# EAGLE board lcd_booster-old (EAGLE 6.1)
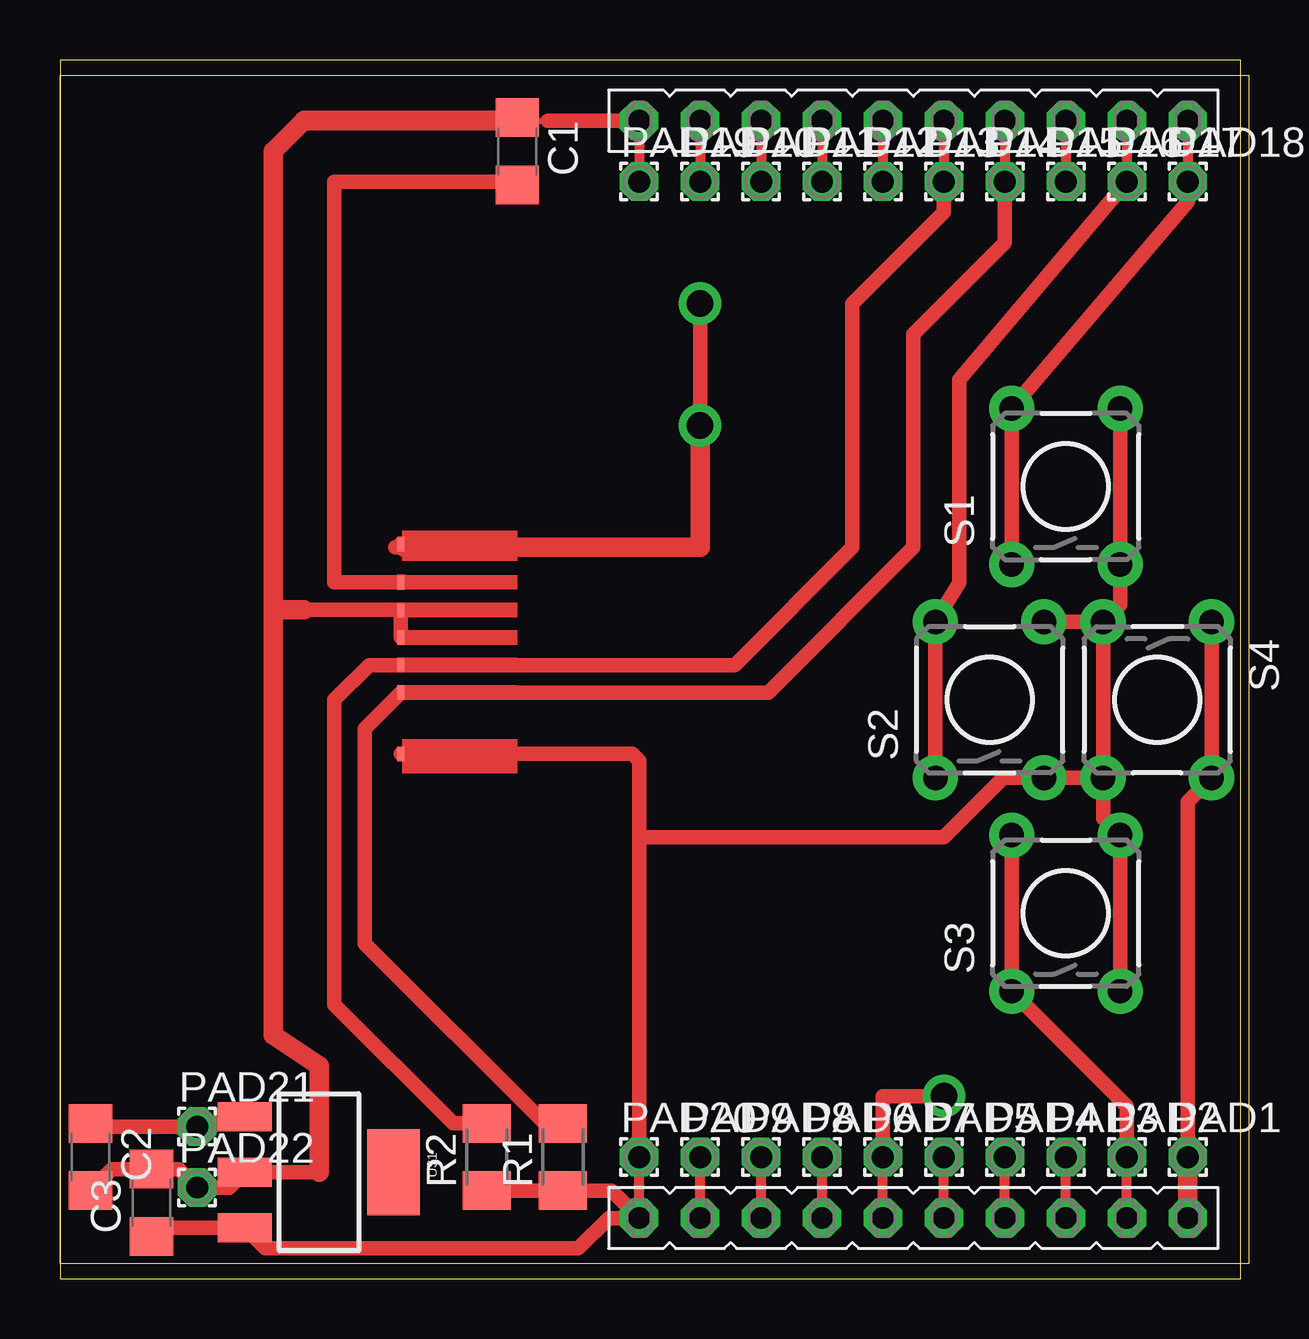
[diagram p0: board, top side]
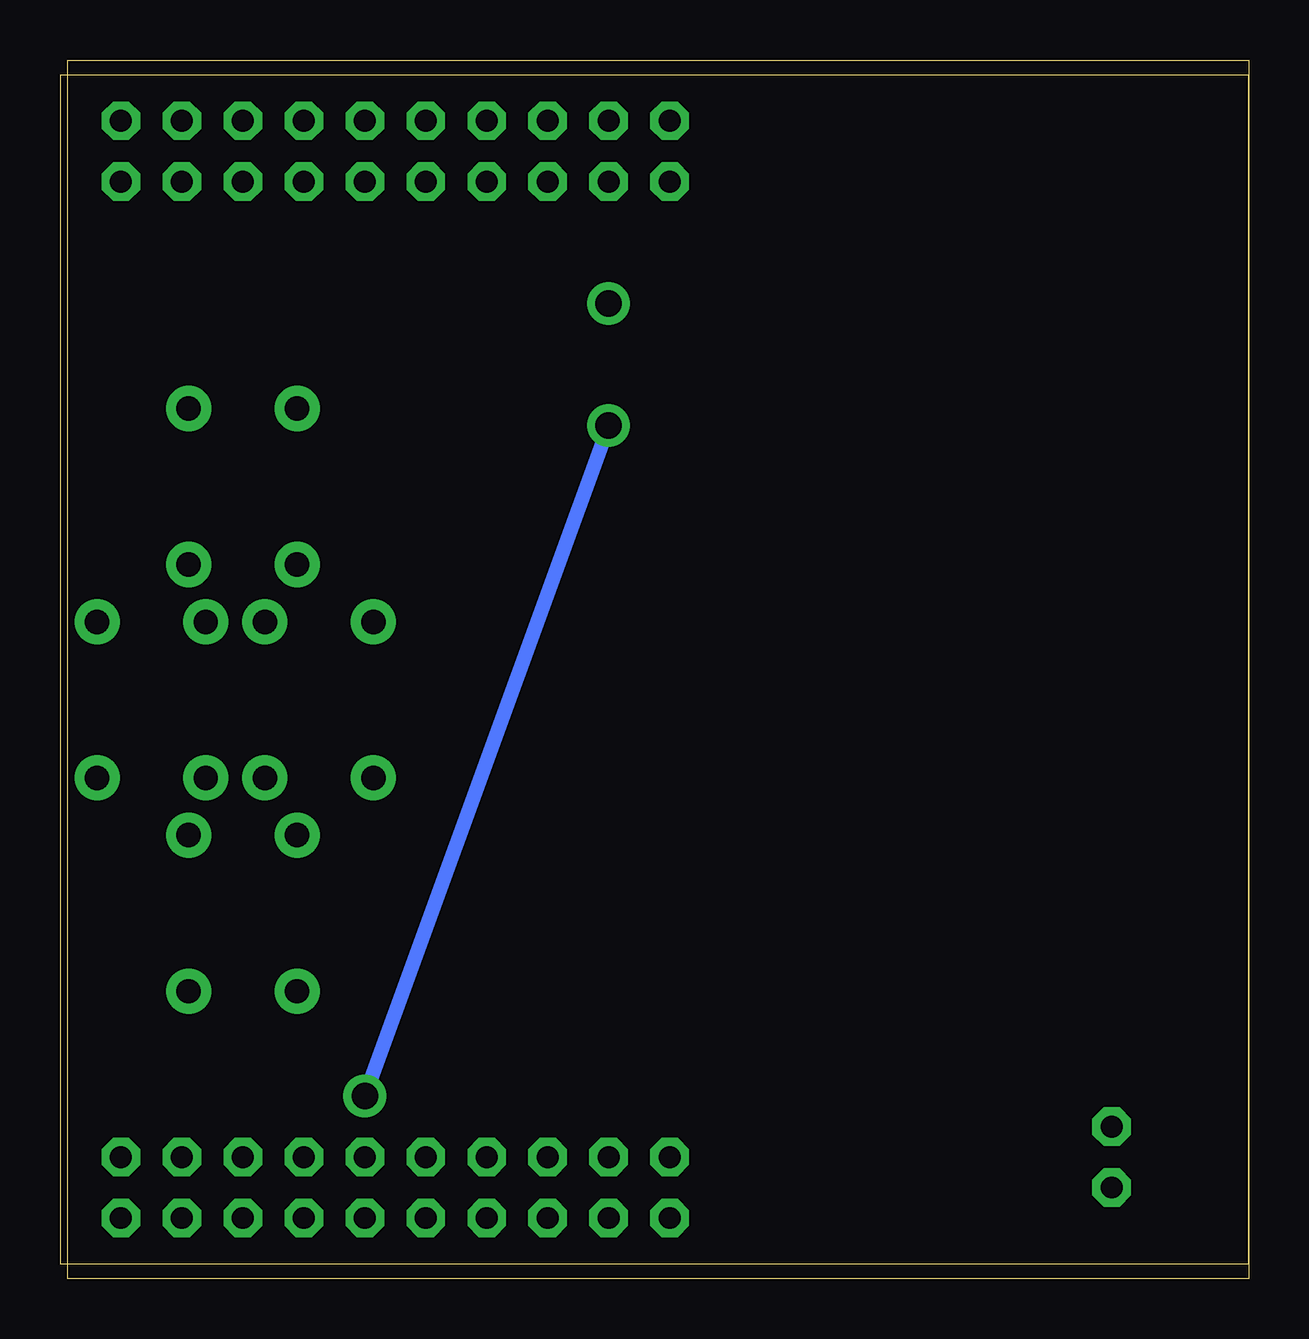
[diagram p1: board, bottom side, seen from below]

Size 49.2 x 50.79 mm. Coordinates in mm from the lower left corner, seen from the top.
Outline: 0,0 49.2,0 49.2,50.79 0,50.79 0,0
Copper layers (1*16): Top 0.035mm / dielectric 1.5mm / Bottom 0.035mm
Design rules: minimum track width 10mil, minimum drill 24mil, track to track 8mil, track to pad 8mil, pad to pad 8mil, via to via 8mil, smd to smd 8mil, copper to edge 40mil, drill to drill 8mil, minimum pad ring 10mil, minimum via ring 8mil, stop-mask expansion 4mil, vias tented up to drill 0mil, thermal gap 10mil

## Footprints (pad centres in the part's own frame; a part is rotated, then mirrored left to right if it is on the bottom)
C1206 = smd 1.6 x 1.8: 1 -1.4,0; 2 1.4,0
1,6/0,9 = drill 0.914 pad 1.6 octagon: 1 0,0
M1206 = smd 1.6 x 2: 1 -1.4,0; 2 1.4,0
TACTILE-PTH = drill 1.016 pad 1.88: 1 -3.251,2.261; 2 3.251,2.261; 3 -3.251,-2.261; 4 3.251,-2.261
SOT223 = smd 1.219 x 2.235: 1 -2.311,-3.099; 2 0,-3.099; 3 2.311,-3.099 | smd 3.6 x 2.2: 4 0,3.099
PE9665ARF = smd 0.61 x 0.305: /RES 6.5,4.85; SAO 2.6,4.85; SCL 0.3,4.85; SDA 1.45,4.85; VDD -2.25,4.85; VLCD 4.9,4.85; VSS 3.75,4.85
LAUNCHPAD-50MM-LEFT = drill 0.914 pad 1.6 octagon: GND 24.13,48.26; P1.0 26.67,2.54; P1.1 29.21,2.54; P1.2 31.75,2.54; P1.3 34.29,2.54; P1.4 36.83,2.54; P1.5 39.37,2.54; P1.6 39.37,48.26; P1.7 36.83,48.26; P2.0 41.91,2.54; P2.1 44.45,2.54; P2.2 46.99,2.54; P2.3 46.99,48.26; P2.4 44.45,48.26; P2.5 41.91,48.26; P2.6 26.67,48.26; P2.7 29.21,48.26; RST 34.29,48.26; TEST 31.75,48.26; VCC 24.13,2.54

## Placement (x,y rotation side)
C1  [C1206]  19.05,46.99 270 top
C2  [C1206]  1.27,5.08 270 top
C3  [C1206]  3.81,3.17 90 top
PAD1  [1,6/0,9]  46.99,5.08 0 top
PAD2  [1,6/0,9]  44.45,5.08 0 top
PAD3  [1,6/0,9]  41.91,5.08 0 top
PAD4  [1,6/0,9]  39.37,5.08 0 top
PAD5  [1,6/0,9]  36.83,5.08 0 top
PAD6  [1,6/0,9]  31.75,5.08 0 top
PAD7  [1,6/0,9]  34.29,5.08 0 top
PAD8  [1,6/0,9]  29.21,5.08 0 top
PAD9  [1,6/0,9]  26.67,5.08 0 top
PAD10  [1,6/0,9]  26.67,45.72 0 top
PAD11  [1,6/0,9]  29.21,45.72 0 top
PAD12  [1,6/0,9]  31.75,45.72 0 top
PAD13  [1,6/0,9]  34.29,45.72 0 top
PAD14  [1,6/0,9]  36.83,45.72 0 top
PAD15  [1,6/0,9]  39.37,45.72 0 top
PAD16  [1,6/0,9]  41.91,45.72 0 top
PAD17  [1,6/0,9]  44.45,45.72 0 top
PAD18  [1,6/0,9]  46.99,45.72 0 top
PAD19  [1,6/0,9]  24.13,45.72 0 top
PAD20  [1,6/0,9]  24.13,5.08 0 top
PAD21  [1,6/0,9]  5.71,6.35 0 top
PAD22  [1,6/0,9]  5.71,3.81 0 top
R1  [M1206]  20.95,5.08 90 top
R2  [M1206]  17.78,5.08 90 top
S1  [TACTILE-PTH]  41.91,33.02 90 top
S2  [TACTILE-PTH]  38.73,24.13 90 top
S3  [TACTILE-PTH]  41.91,15.24 90 top
S4  [TACTILE-PTH]  45.72,24.13 270 top
U$1  V_REG_MIC2920  [SOT223]  10.79,4.45 270 top
U$2  PE9665ARF  [PE9665ARF]  19.05,24.13 90 top
U$3  LAUNCHPAD-50MM-LEFT  [LAUNCHPAD-50MM-LEFT]  0,0 0 top

## Library data of the parts
C1-C3 = rcl
PAD1-PAD22 = wirepad
R1 R2 = resistor
S1-S4 U$1 = SparkFun
U$2 = apus
U$3 = TI_launchpad

## Nets
N$1: PAD1.1 S4.1 S4.2 U$3.P2.2
N$2: PAD17.1 S2.1 S2.2 U$3.P2.4
N$3: PAD15.1 R1.2 U$2.SCL U$3.P1.6
N$4: PAD14.1 R2.2 U$2.SDA U$3.P1.7
N$5: C1.1 C2.2 C3.2 PAD19.1 PAD22.1 U$1.2 U$2.SAO U$2.VSS U$3.GND
N$6: C1.2 U$2.VLCD
N$7: PAD2.1 S3.1 S3.2 U$3.P2.1
N$8: PAD7.1 U$2./RES U$3.P1.3
N$9: PAD3.1 U$3.P2.0
N$10: PAD18.1 S1.1 S1.2 U$3.P2.3
N$11: PAD4.1 U$3.P1.5
N$13: PAD5.1 U$3.P1.4
N$14: PAD6.1 U$3.P1.2
N$15: PAD8.1 U$3.P1.1
N$16: PAD9.1 U$3.P1.0
N$17: PAD10.1 U$3.P2.6
N$18: PAD11.1 U$3.P2.7
N$19: PAD12.1 U$3.TEST
N$20: PAD13.1 U$3.RST
N$21: PAD16.1 U$3.P2.5
N$25: C3.1 PAD20.1 R1.1 R2.1 S1.3 S1.4 S2.3 S2.4 S3.3 S3.4 S4.3 S4.4 U$1.3 U$2.VDD U$3.VCC
N$28: C2.1 PAD21.1 U$1.1

## Tracks (layer width: path | path; a pad name or v marks a point on that pad's centre or on a via)
N$1
  Top 0.61: S4.1 S4.2 46.99,19.89 PAD1.1
  Top 0.813: PAD1.1 U$3.P2.2
N$2
  Top 0.406: U$3.P2.4 PAD17.1
  Top 0.61: S2.1 S2.2 37.47,29.01 37.47,37.47 PAD17.1
N$3
  Top 0.406: U$3.P1.6 PAD15.1
  Top 0.61: R1.2 20.19,6.48 12.7,13.97 12.7,22.93 U$2.SCL 29.51,24.43 35.56,30.48 35.56,39.37 39.37,43.18 PAD15.1
N$4
  Top 0.406: U$3.P1.7 PAD14.1
  Top 0.61: R2.2 16.38,6.48 11.43,11.43 11.43,24.13 12.88,25.58 U$2.SDA 28.12,25.58 33.02,30.48 33.02,40.64 36.83,44.45 PAD14.1
N$5
  Top 0.254: 20.32,48.26 19.05,48.26 C1.1
  Top 0.406: U$3.GND PAD19.1
  Top 0.61: U$3.GND 20.32,48.26 | C1.1 10.16,48.39 | U$2.SAO U$2.VSS 10.16,27.88 | 10.79,4.45 U$1.2 7.06,3.81 PAD22.1 4.95,4.58 C3.2 2.17,4.58 C2.2
  Top 0.813: 10.79,4.45 10.79,8.89 8.89,10.16 8.89,27.94 | 8.89,27.94 8.89,46.99 10.16,48.26 19.05,48.26 | 10.16,27.88 8.95,27.88 8.89,27.94
N$6
  Top 0.61: U$2.VLCD 11.43,29.03 11.43,45.72 19.05,45.72 C1.2
N$7
  Top 0.406: U$3.P2.1 PAD2.1
  Top 0.61: S3.2 S3.1 44.45,7.19 PAD2.1
N$8  (via drill 1.1 pad 1.78)
  Top 0.406: U$3.P1.3 PAD7.1
  Top 0.61: U$2./RES 14.35,30.48 13.97,30.48 | v36.83,7.62 34.29,7.62 PAD7.1 | v26.67,40.64 v26.67,35.56
  Top 0.813: 14.35,30.48 26.67,30.48 v26.67,35.56
  Bottom 0.61: v26.67,35.56 v36.83,7.62
N$9
  Top 0.406: U$3.P2.0 PAD3.1
N$10
  Top 0.406: U$3.P2.3 PAD18.1
  Top 0.61: S1.1 S1.2 46.99,44.88 PAD18.1
N$11
  Top 0.406: U$3.P1.5 PAD4.1
N$13
  Top 0.406: U$3.P1.4 PAD5.1
N$14
  Top 0.406: U$3.P1.2 PAD6.1
N$15
  Top 0.406: U$3.P1.1 PAD8.1
N$16
  Top 0.406: U$3.P1.0 PAD9.1
N$17
  Top 0.406: U$3.P2.6 PAD10.1
N$18
  Top 0.406: U$3.P2.7 PAD11.1
N$19
  Top 0.406: U$3.TEST PAD12.1
N$20
  Top 0.406: U$3.RST PAD13.1
N$21
  Top 0.406: U$3.P2.5 PAD16.1
N$25
  Top 0.406: U$3.VCC PAD20.1
  Top 0.61: S3.3 S3.4 43.46,19.2 S4.4 | S4.4 S2.3 39.29,20.88 36.83,18.41 24.13,18.41 | S4.4 S4.3 | S4.3 44.17,28.09 S1.3 S1.4 | S4.3 S2.4 | 24.13,18.41 24.13,21.59 23.84,21.88 U$2.VDD | 24.13,18.41 PAD20.1 | R2.1 R1.1 22.99,3.68 U$3.VCC 22.86,2.54 21.59,1.27 8.56,1.27 U$1.3 4.17,2.13 C3.1
N$28
  Top 0.61: PAD21.1 5.21,6.48 | U$1.1 6.76,6.76 6.35,6.35 PAD21.1 | PAD21.1 1.4,6.35 C2.1